# EAGLE board CPU (EAGLE 7.6.0)
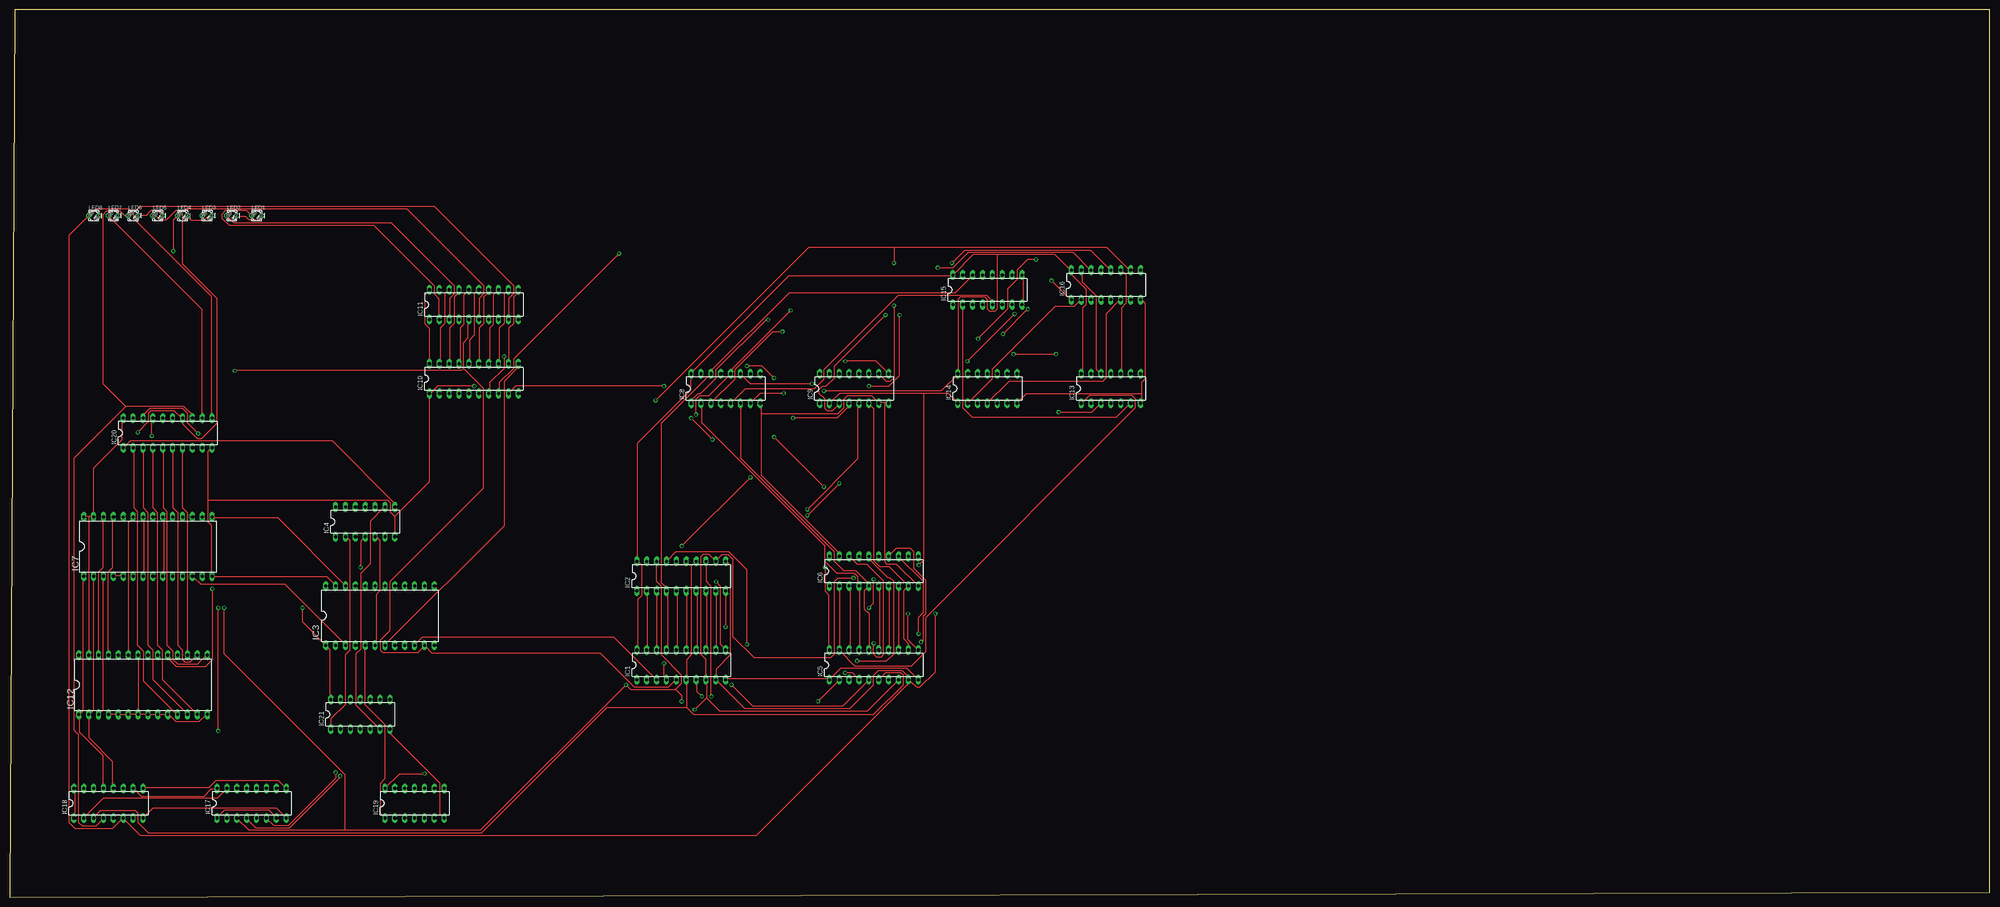
[diagram p0: board, top side]
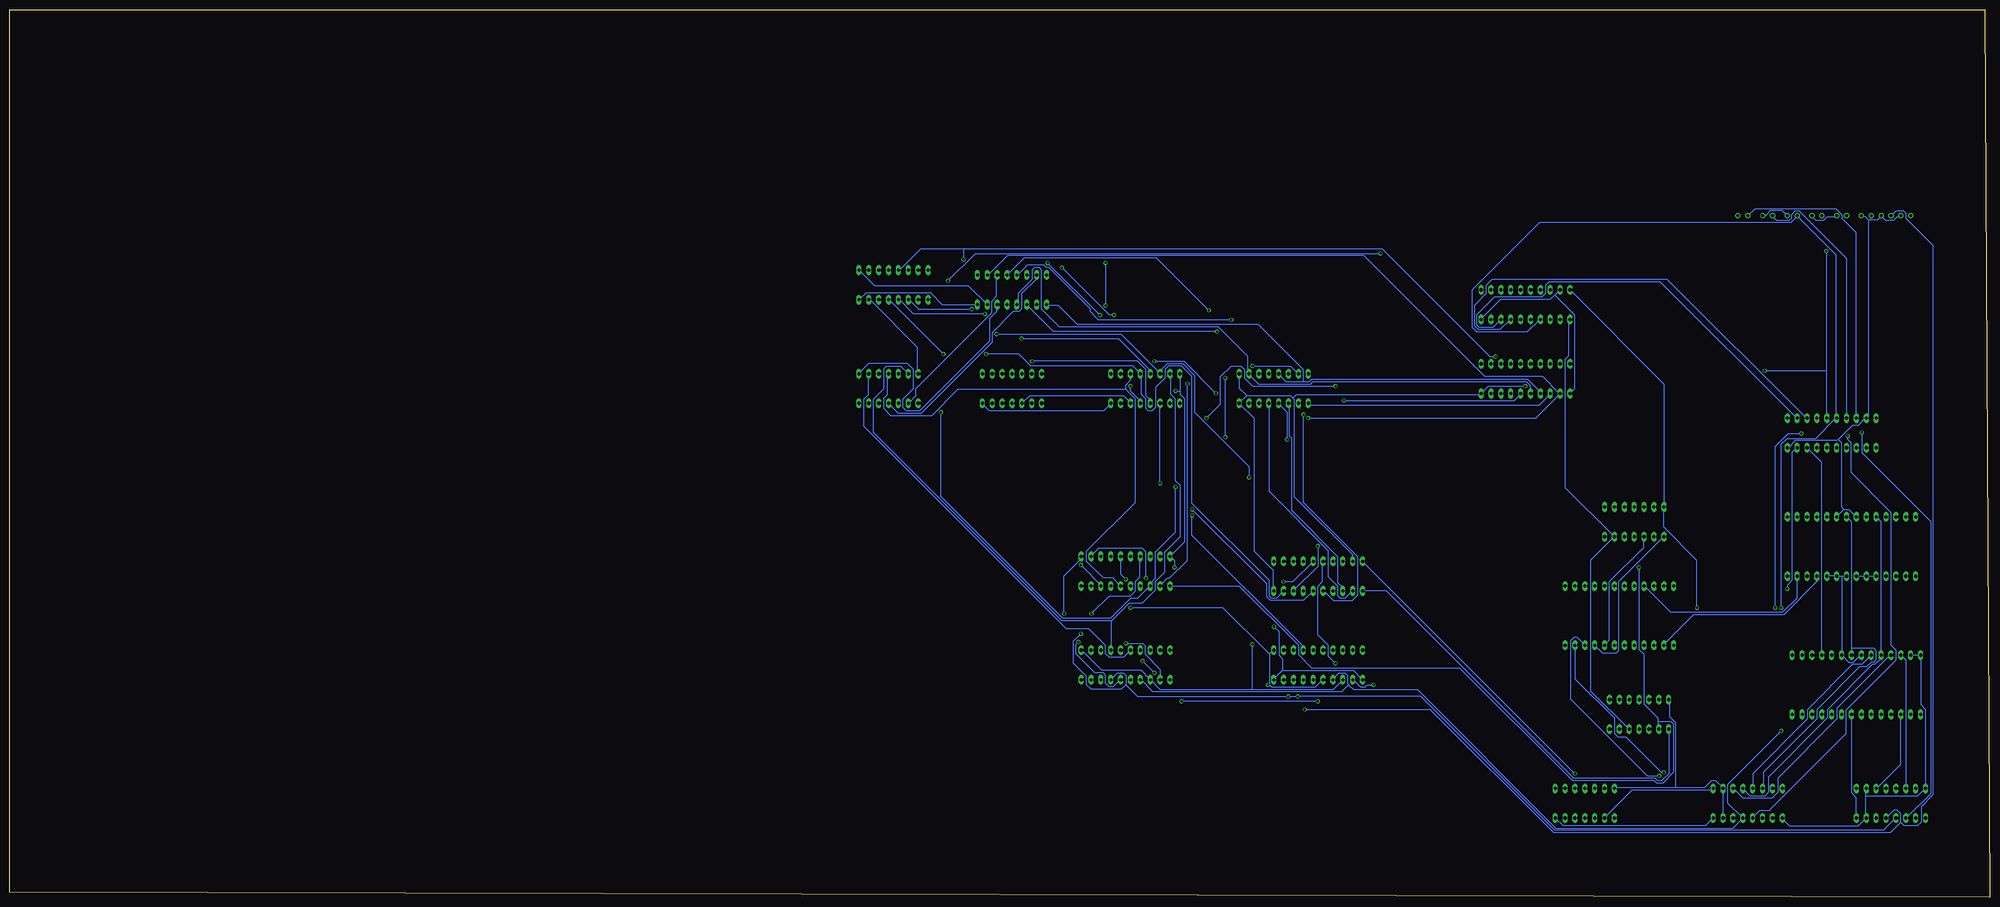
[diagram p1: board, bottom side, seen from below]

Size 509.25 x 228.27 mm. Coordinates in mm from the lower left corner, seen from the top.
Outline: 0,0 509.25,1.27 509.25,228.27 1.27,228.27 0,0
Copper layers (1*16): Top 0.035mm / dielectric 1.5mm / Bottom 0.035mm
Design rules "default": minimum track width 10mil, minimum drill 24mil, track to track 8mil, track to pad 8mil, pad to pad 8mil, via to via 8mil, smd to smd 8mil, copper to edge 40mil, drill to drill 8mil, minimum pad ring 10mil, minimum via ring 8mil, stop-mask expansion 4mil, vias tented up to drill 0mil, thermal gap 10mil
Net classes: 0 default: width 0.305 mm, drill 0.508 mm, clearance 0.305 mm; 1 VCC: width 0.381 mm, drill 0.508 mm, clearance 0.305 mm to class 0; 2 GND: width 0.381 mm, drill 0.508 mm, clearance 0.305 mm to class 0

## Footprints (pad centres in the part's own frame; a part is rotated, then mirrored left to right if it is on the bottom)
DIL20 = drill 0.813 long: 1 -11.43,-3.81; 2 -8.89,-3.81; 3 -6.35,-3.81; 4 -3.81,-3.81; 5 -1.27,-3.81; 6 1.27,-3.81; 7 3.81,-3.81; 8 6.35,-3.81; 9 8.89,-3.81; 10 11.43,-3.81; 11 11.43,3.81; 12 8.89,3.81; 13 6.35,3.81; 14 3.81,3.81; 15 1.27,3.81; 16 -1.27,3.81; 17 -3.81,3.81; 18 -6.35,3.81; 19 -8.89,3.81; 20 -11.43,3.81
DIL24-6 = drill 0.813 long: 1 -13.97,-7.62; 2 -11.43,-7.62; 3 -8.89,-7.62; 4 -6.35,-7.62; 5 -3.81,-7.62; 6 -1.27,-7.62; 7 1.27,-7.62; 8 3.81,-7.62; 9 6.35,-7.62; 10 8.89,-7.62; 11 11.43,-7.62; 12 13.97,-7.62; 13 13.97,7.62; 14 11.43,7.62; 15 8.89,7.62; 16 6.35,7.62; 17 3.81,7.62; 18 1.27,7.62; 19 -1.27,7.62; 20 -3.81,7.62; 21 -6.35,7.62; 22 -8.89,7.62; 23 -11.43,7.62; 24 -13.97,7.62
DIL14 = drill 0.813 long: 1 -7.62,-3.81; 2 -5.08,-3.81; 3 -2.54,-3.81; 4 0,-3.81; 5 2.54,-3.81; 6 5.08,-3.81; 7 7.62,-3.81; 8 7.62,3.81; 9 5.08,3.81; 10 2.54,3.81; 11 0,3.81; 12 -2.54,3.81; 13 -5.08,3.81; 14 -7.62,3.81
DIL28-6 = drill 0.813 long: 1 -16.51,-7.62; 2 -13.97,-7.62; 3 -11.43,-7.62; 4 -8.89,-7.62; 5 -6.35,-7.62; 6 -3.81,-7.62; 7 -1.27,-7.62; 8 1.27,-7.62; 9 3.81,-7.62; 10 6.35,-7.62; 11 8.89,-7.62; 12 11.43,-7.62; 13 13.97,-7.62; 14 16.51,-7.62; 15 16.51,7.62; 16 13.97,7.62; 17 11.43,7.62; 18 8.89,7.62; 19 6.35,7.62; 20 3.81,7.62; 21 1.27,7.62; 22 -1.27,7.62; 23 -3.81,7.62; 24 -6.35,7.62; 25 -8.89,7.62; 26 -11.43,7.62; 27 -13.97,7.62; 28 -16.51,7.62
DIL16 = drill 0.813 long: 1 -8.89,-3.81; 2 -6.35,-3.81; 3 -3.81,-3.81; 4 -1.27,-3.81; 5 1.27,-3.81; 6 3.81,-3.81; 7 6.35,-3.81; 8 8.89,-3.81; 9 8.89,3.81; 10 6.35,3.81; 11 3.81,3.81; 12 1.27,3.81; 13 -1.27,3.81; 14 -3.81,3.81; 15 -6.35,3.81; 16 -8.89,3.81
LED_LD260 = drill 0.813 octagon: A -1.27,0; K 1.27,0

## Placement (x,y rotation side)
IC1  74HC574N  [DIL20]  172.72,59.69 0 top
IC2  74LS541N  [DIL20]  172.72,82.55 0 top
IC3  4514N  [DIL24-6]  95.25,72.39 0 top
IC4  74LS04N  [DIL14]  91.44,96.52 0 top
IC5  74HC574N  [DIL20]  222.25,59.69 0 top
IC6  74LS541N  [DIL20]  222.25,83.82 0 top
IC7  CY62256LL-PC  [DIL28-6]  35.56,90.17 0 top
IC8  74S283N  [DIL16]  184.15,130.81 0 top
IC9  74S283N  [DIL16]  217.17,130.81 0 top
IC10  74HC574N  [DIL20]  119.38,133.35 0 top
IC11  74LS541N  [DIL20]  119.38,152.4 0 top
IC12  CY62256LL-PC  [DIL28-6]  34.29,54.61 0 top
IC13  74AS04N  [DIL14]  283.21,130.81 0 top
IC14  74AS04N  [DIL14]  251.46,130.81 0 top
IC15  74S283N  [DIL16]  251.46,156.21 0 top
IC16  74S283N  [DIL16]  281.94,157.48 0 top
IC17  [DIL16]  62.23,24.13 0 top
IC18  [DIL16]  25.4,24.13 0 top
IC19  74ALS04N  [DIL14]  104.14,24.13 0 top
IC20  74LS541N  [DIL20]  40.64,119.38 0 top
IC21  74LS08N  [DIL14]  90.17,46.99 0 top
LED1  [LED_LD260]  63.5,175.26 0 top
LED2  [LED_LD260]  57.15,175.26 0 top
LED3  [LED_LD260]  50.8,175.26 0 top
LED4  [LED_LD260]  44.45,175.26 0 top
LED5  [LED_LD260]  38.1,175.26 0 top
LED6  [LED_LD260]  31.75,175.26 0 top
LED7  [LED_LD260]  26.67,175.26 0 top
LED8  [LED_LD260]  21.59,175.26 0 top

## Library data of the parts
IC1 IC2 IC4-IC6 IC8-IC11 IC13-IC16 IC19-IC21 = 74xx-us
IC3 = 45xx
IC7 IC12 = memory-sram
IC17 IC18 = ic-package
LED1-LED8 = eagle-ltspice; SPICEMODEL: NONE; SPICEPREFIX: D; SPICETYPE: diode

## Nets
BUS0: IC1.2 IC2.18 IC5.2 IC6.18 IC11.2 IC17.3 IC20.18 LED1.A
BUS1: IC1.3 IC2.17 IC3.10 IC5.3 IC5.11 IC6.17 IC11.3 IC17.4 IC20.17 LED2.A
BUS2: IC1.4 IC2.16 IC5.4 IC6.16 IC11.4 IC17.5 IC20.16 LED3.A
BUS3: IC1.5 IC1.11 IC2.15 IC3.11 IC5.5 IC6.15 IC11.5 IC17.6 IC20.15 LED4.A
BUS4: IC1.6 IC2.14 IC5.6 IC6.14 IC11.6 IC18.3 IC20.14 LED5.A
BUS5: IC1.7 IC2.13 IC5.7 IC6.13 IC11.7 IC18.4 IC20.13 LED6.A
BUS6: IC1.8 IC2.12 IC5.8 IC6.12 IC11.8 IC18.5 IC20.12 LED7.A
BUS7: IC1.9 IC2.11 IC5.9 IC6.11 IC11.9 IC18.6 IC20.11 LED8.A
GND: IC1.1 IC1.10 IC2.10 IC2.19 IC3.23 IC4.7 IC5.1 IC5.10 IC6.10 IC6.19 IC7.4 IC7.5 IC7.6 IC7.7 IC7.8 IC7.9 IC7.10 IC7.14 IC7.20 IC7.22 IC8.8 IC8.9 IC9.7 IC9.8 IC10.1 IC10.10 IC11.10 IC11.19 IC12.4 IC12.5 IC12.6 IC12.7 IC12.8 IC12.9 IC12.10 IC12.14 IC12.20 IC12.22 IC13.7 IC14.7 IC15.8 IC15.9 IC16.8 IC17.8 IC18.8 IC19.7 IC20.10 IC20.19 IC21.7 LED1.K LED2.K LED3.K LED4.K LED5.K LED6.K LED7.K LED8.K
N$1: IC1.19 IC2.2 IC8.5 IC15.5
N$2: IC1.18 IC2.3 IC8.3 IC15.3
N$3: IC1.17 IC2.4 IC8.14 IC15.14
N$4: IC1.14 IC2.7 IC9.3 IC16.14
N$5: IC1.15 IC2.6 IC9.5 IC16.12
N$6: IC4.8 IC20.1
N$7: IC1.13 IC2.8 IC9.14 IC16.3
N$8: IC1.12 IC2.9 IC9.12 IC16.5
N$9: IC3.2 IC7.11
N$10: IC3.3 IC7.12
N$11: IC3.21 IC7.13
N$12: IC3.22 IC7.15
N$13: IC3.9 IC4.1
N$14: IC2.1 IC4.2 IC21.1
N$15: IC13.2 IC15.11
N$16: IC13.4 IC15.15
N$17: IC5.17 IC6.4 IC8.2
N$18: IC5.16 IC6.5 IC8.6 IC13.9
N$19: IC5.15 IC6.6 IC9.11 IC13.11
N$20: IC5.14 IC6.7 IC9.15 IC13.13
N$21: IC5.13 IC6.8 IC9.2 IC14.1
N$22: IC13.5
N$23: IC4.4 IC6.1 IC21.2
N$24: IC3.8 IC4.3
N$25: IC1.16 IC2.5 IC8.12 IC15.12
N$26: IC8.7 IC9.9
N$27: IC8.4 IC10.2 IC15.10
N$28: IC8.1 IC10.3 IC15.13
N$29: IC8.13 IC10.4 IC15.1
N$30: IC8.10 IC10.5 IC15.4
N$31: IC9.10 IC10.6 IC16.10
N$32: IC9.13 IC10.7 IC16.13
N$33: IC10.8 IC16.1
N$34: IC9.4 IC10.9 IC16.4
N$35: IC10.19 IC11.18
N$36: IC10.18 IC11.17
N$37: IC10.17 IC11.16
N$38: IC10.16 IC11.15
N$39: IC10.15 IC11.14
N$40: IC10.14 IC11.13
N$41: IC10.13 IC11.12
N$42: IC10.12 IC11.11
N$43: IC3.7 IC10.11
N$44: IC3.6 IC4.5
N$45: IC4.6 IC11.1 IC21.5
N$46: IC7.21 IC12.21 IC17.14
N$47: IC7.23 IC12.23 IC17.13
N$48: IC7.24 IC12.24 IC17.12
N$49: IC7.25 IC12.25 IC17.11
N$50: IC7.26 IC12.26 IC18.14
N$51: IC7.1 IC12.1 IC18.13
N$52: IC7.2 IC12.2 IC18.12
N$53: IC7.3 IC12.3 IC18.11
N$54: IC12.11 IC20.2
N$55: IC12.12 IC20.3
N$56: IC12.13 IC20.4
N$57: IC12.15 IC20.5
N$58: IC12.16 IC20.6
N$59: IC12.17 IC20.7
N$60: IC12.18 IC20.8
N$61: IC5.18 IC6.3 IC8.15 IC13.3
N$62: IC5.19 IC6.2 IC8.11 IC13.1
N$63: IC13.6 IC15.2
N$64: IC13.8 IC15.6
N$65: IC13.10 IC16.11
N$66: IC13.12 IC16.15
N$67: IC5.12 IC6.9 IC9.6 IC14.3
N$68: IC14.2 IC16.2
N$69: IC14.4 IC16.6
N$70: IC17.2
N$71: IC17.15 IC18.2
N$72: IC3.5 IC19.1
N$73: IC17.9 IC18.9 IC19.2
N$74: IC15.7 IC16.9
N$75: IC4.9 IC21.6
N$76: IC21.4
N$77: IC12.19 IC20.9
VCC: IC1.20 IC2.20 IC3.1 IC4.14 IC5.20 IC6.20 IC7.27 IC7.28 IC8.16 IC9.16 IC10.20 IC11.20 IC12.27 IC12.28 IC13.14 IC14.14 IC15.16 IC16.7 IC16.16 IC17.1 IC17.7 IC17.10 IC17.16 IC18.1 IC18.7 IC18.10 IC18.16 IC19.14 IC20.20 IC21.14
VDD: IC3.24
VSS: IC3.12

## Tracks (layer width: path | path; a pad name or v marks a point on that pad's centre or on a via)
BUS0  (via drill 0.61)
  Top 0.305: LED1.A 60.96,176.53 55.47,176.53 54.56,175.62 54.56,174.7 56.39,172.87 93.57,172.87 109.12,157.33 109.12,155.19 110.34,153.98 110.34,148.79 IC11.2 | v222.2,65.28 222.2,62.54 223.11,61.62 224.03,61.62 224.64,62.23 224.64,81.43 220.37,85.7 217.93,85.7 216.1,87.53 IC6.18 | 86.26,17.12 121.01,17.12 v158.5,54.61 159.72,53.39 171.3,53.39 | 86.26,17.12 61.57,17.12 58.52,20.17 IC17.3 | 171.3,53.39 172.82,54.92 172.82,57.05 167.64,62.23 167.64,79.91 166.42,81.13 166.42,86.31 IC2.18 | v207.87,50.34 213.36,55.83 IC5.2 | v172.82,50.34 172.82,51.87 171.3,53.39 | v48.46,119.23 45.72,121.97 45.72,124.41 44.5,125.63 35.97,125.63 34.44,124.1 34.44,123.19 IC20.18 | v55.17,74.42 55.17,62.54 86.26,31.45 86.26,17.12
  Bottom 0.305: LED1.A 60.35,177.14 39.62,177.14 38.1,175.62 38.1,174.7 34.44,171.04 34.44,123.19 IC20.18 | IC5.2 213.36,58.57 217.32,62.54 217.32,64.67 217.93,65.28 v222.2,65.28 | v158.5,54.61 160.02,54.61 160.63,54 161.85,54 163.68,55.83 IC1.2 | v172.82,50.34 v207.87,50.34 | v48.46,119.23 51.82,119.23 55.17,115.88 v55.17,74.42
BUS1  (via drill 0.61)
  Top 0.305: IC11.3 113.08,148.79 113.08,153.98 114.3,155.19 114.3,157.33 98.15,173.48 57.61,173.48 56.08,175.01 LED2.A | v85.04,31.14 85.04,30.84 71.93,17.73 63.4,17.73 60.96,20.17 IC17.4 | IC2.17 171.3,88.75 185.01,88.75 189.59,84.18 v189.59,64.97 | v231.04,72.9 231.04,66.19 233.48,63.75 IC5.11 | IC1.3 155.45,66.8 106.07,66.8 104.24,64.97 IC3.10 | v36.58,118.62 36.58,123.19 IC20.17
  Bottom 0.305: IC20.17 36.88,123.19 36.88,164.34 49.07,176.53 49.99,176.53 50.9,175.62 50.9,174.7 51.51,174.09 54.86,174.09 55.78,175.01 LED2.A | v85.04,31.14 88.09,31.14 107.9,50.95 107.9,65.89 106.98,66.8 106.07,66.8 104.24,64.97 IC3.10 | IC1.3 168.86,53.39 189.59,53.39 | 189.59,53.39 213.36,53.39 215.8,55.83 IC5.3 216.1,56.13 218.24,58.27 228.29,58.27 233.48,63.45 IC5.11 | 189.59,53.39 v189.59,64.97 | v231.04,72.9 226.47,77.47 220.98,77.47 219.76,78.69 219.76,81.13 218.54,82.35 218.54,87.53 IC6.17 | v36.58,118.62 36.58,117.7 35.66,116.79 35.66,109.17 25.3,98.81 25.3,64.67 24.08,63.45 24.08,61.01 36.88,48.21 36.88,42.11 56.69,22.3 59.13,22.3 60.96,20.47 IC17.4
BUS2  (via drill 0.61)
  Top 0.305: v168.25,60.1 168.25,56.74 168.86,56.13 IC1.4 | IC6.16 220.98,86.92 225.86,82.04 226.47,82.04 227.38,81.13 227.38,62.54 225.55,60.71 v217.93,60.71 | v214.88,57.66 216.71,57.66 218.24,56.13 IC5.4 | v53.65,42.72 v53.65,74.42
  Bottom 0.305: 39.62,123.19 39.62,165.25 49.38,175.01 LED3.A 49.68,175.01 51.21,173.48 115.82,173.48 133.2,156.11 133.2,146.66 131.98,145.44 118.87,145.44 115.82,148.49 IC11.4 | 164.9,54.61 165.2,54.92 165.2,57.05 165.81,57.66 167.34,57.66 168.86,56.13 IC1.4 | 164.9,54.61 163.68,53.39 147.22,53.39 111.56,17.73 66.14,17.73 63.7,20.17 IC17.5 63.7,20.47 67.36,24.13 67.36,29.01 v53.65,42.72 | v168.25,60.1 170.08,61.93 170.08,64.67 172.82,67.41 172.82,79.91 171.6,81.13 171.6,86.31 IC2.16 | 164.9,54.61 166.73,52.78 215.19,52.78 218.24,55.83 IC5.4 | v214.88,57.66 v217.93,60.71 | 39.62,123.19 44.81,118.01 52.12,118.01 53.65,116.48 v53.65,74.42 | 39.62,123.19 IC20.16
BUS3  (via drill 0.61)
  Top 0.305: v181.66,81.13 182.88,79.91 182.88,64.97 184.1,63.75 IC1.11 | v185.62,54.61 191.11,49.12 214.27,49.12 220.98,55.83 IC5.5 | v222.2,81.74 222.2,75.64 v220.98,74.42 | v42.06,166.17 42.06,174.09 42.98,175.01 LED4.A | v83.82,32.05 83.82,30.53 71.63,18.34 67.97,18.34 66.14,20.17 IC17.6 | 116.74,135.99 116.74,142.7 117.96,143.92 117.96,148.49 IC11.5 | 116.74,135.99 121.92,130.81 121.92,105.21 97.84,81.13 97.84,68.63 95.4,66.19 95.4,63.45 96.01,62.84 104.85,62.84 106.68,64.67 | v57.91,135.38 116.13,135.38 116.74,135.99 | 106.68,64.67 108.51,62.84 151.79,62.84 160.63,54 169.47,54 171.3,55.83 IC1.5 | 106.68,64.67 IC3.11
  Bottom 0.305: 185.32,54.61 184.71,54 173.43,54 171.6,55.83 IC1.5 | 185.32,62.54 185.32,54.61 | 185.32,62.54 184.4,63.45 IC1.11 | IC2.15 179.22,81.13 v181.66,81.13 | 185.32,54.61 v185.62,54.61 | v222.2,81.74 223.42,82.96 223.42,87.53 IC6.15 | v220.98,74.42 197.21,74.42 185.32,62.54 | v42.06,166.17 42.06,135.38 | 42.06,135.38 42.06,123.19 IC20.15 | v83.82,32.05 84.43,32.05 93.57,41.2 95.71,41.2 96.62,42.11 96.62,46.08 106.68,56.13 IC3.11 | v57.91,135.38 42.06,135.38
BUS4  (via drill 0.61)
  Top 0.305: IC2.14 175.26,85.09 175.26,62.23 174.04,61.01 174.04,56.13 IC1.6 174.04,55.83 174.04,48.82 | 174.04,48.82 175.87,46.99 222.2,46.99 229.82,54.61 229.82,57.05 229.21,57.66 225.25,57.66 223.72,56.13 IC5.6 | v234.39,65.58 235,66.19 235,72.29 235.61,72.9 235.61,81.43 232.56,84.48 232.56,88.75 231.65,89.66 227.99,89.66 226.16,87.83 IC6.14 | v32.92,119.53 35.66,122.28 35.66,124.41 36.27,125.02 42.37,125.02 44.2,123.19 IC20.14 44.5,123.19 44.5,121.67 48.16,118.01 49.38,118.01 53.34,121.97 53.34,153.98 44.5,162.81 44.5,175.62 44.2,175.92 | 44.2,175.92 43.59,176.53 42.67,176.53 40.23,174.09 38.71,174.09 37.8,175.01 36.88,175.01 LED5.A | 44.2,175.92 45.41,177.14 102.11,177.14 121.92,157.33 121.92,155.19 120.7,153.98 120.7,148.79 IC11.6 | 174.04,48.82 153.62,48.82 121.31,16.51 35.66,16.51 32.92,19.25 32.92,21.69 32.31,22.3 23.47,22.3 21.64,20.47 IC18.3
  Bottom 0.305: v234.39,65.58 235,64.97 235,62.54 230.12,57.66 227.99,57.66 227.38,57.05 227.38,54.92 226.47,54 225.55,54 223.72,55.83 IC5.6 | v32.92,119.53 32.92,114.35 15.24,96.67 15.24,26.57 21.34,20.47 IC18.3
BUS5  (via drill 0.61)
  Top 0.305: v178,51.56 176.78,52.78 176.78,55.83 IC1.7 | v180.44,51.56 180.44,79.91 179.22,81.13 179.22,86.31 IC2.13 | v233.78,67.72 233.78,71.98 235,73.2 235,81.13 228.6,87.53 IC6.13 | 29.87,126.24 16.46,112.83 16.46,43.03 17.68,41.81 17.68,19.25 18.59,18.34 22.25,18.34 24.08,20.17 IC18.4 | 29.87,126.24 44.81,126.24 46.94,124.1 46.94,123.19 IC20.13 | 29.87,126.24 24.08,132.03 24.08,175.62 24.99,176.53 28.35,176.53 29.57,175.31 30.48,175.31 LED6.A
  Bottom 0.305: 222.2,54.61 219.15,51.56 v180.44,51.56 v178,51.56 146.3,51.56 111.86,17.12 27.43,17.12 24.38,20.17 IC18.4 | 222.2,54.61 222.2,57.05 222.81,57.66 224.33,57.66 225.86,56.13 IC5.7 | v233.78,67.72 235.61,65.89 235.61,60.1 232.26,56.74 232.26,54.61 231.04,53.39 223.42,53.39 222.2,54.61 | IC11.7 123.44,148.49 125.88,146.05 131.67,146.05 132.59,146.96 132.59,152.15 129.54,155.19 129.54,157.33 128.02,158.85 82.91,158.85 47.24,123.19 IC20.13
BUS6  (via drill 0.61)
  Top 0.305: 179.22,51.26 182.57,47.9 220.68,47.9 228.6,55.83 IC5.8 | 179.22,51.26 179.22,55.83 IC1.8 178.92,56.13 178.92,61.32 177.7,62.54 177.7,87.53 178.31,88.14 179.83,88.14 IC2.12 181.66,86.61 183.19,88.14 184.71,88.14 185.93,86.92 185.93,67.11 191.41,61.62 211.23,61.62 212.14,62.54 212.14,81.13 213.06,82.04 v217.02,82.04 | IC20.12 49.38,123.19 49.38,151.23 25.6,175.01 LED7.A | v176.17,48.21 179.22,51.26
  Bottom 0.305: v217.02,82.04 217.02,88.75 217.93,89.66 229.21,89.66 231.04,87.83 IC6.12 | IC18.5 24.69,22.3 23.77,22.3 22.86,21.39 22.86,19.25 | 22.86,19.25 21.95,18.34 18.59,18.34 17.68,19.25 17.68,23.22 14.63,26.26 14.63,167.69 21.64,174.7 21.64,175.92 22.25,176.53 24.08,176.53 25.3,175.31 LED7.A | IC11.8 125.88,148.49 127.71,146.66 131.37,146.66 131.98,147.27 131.98,149.71 127.41,154.28 115.21,154.28 114.3,155.19 114.3,157.33 113.39,158.24 84.73,158.24 49.68,123.19 IC20.12 | v176.17,48.21 143.87,48.21 112.17,16.51 25.6,16.51 22.86,19.25
BUS7  (via drill 0.61)
  Top 0.305: IC2.11 184.4,86.31 185.32,85.39 185.32,62.23 181.66,58.57 181.66,56.13 IC1.9 188.98,48.51 216.1,48.51 222.2,54.61 222.2,57.05 223.42,58.27 229.51,58.27 231.04,56.74 231.04,56.13 IC5.9 | v238.05,72.9 238.05,57.96 234.09,54 233.17,54 231.65,55.52 | 231.65,55.52 231.34,55.83 IC5.9 | 31.7,175.92 31.7,174.7 51.82,154.58 51.82,123.19 IC20.11 | 31.7,175.92 30.48,177.14 22.25,177.14 20.42,175.31 LED8.A 20.12,175.01 15.24,170.13 15.24,19.25 16.76,17.73 26.52,17.73 28.96,20.17 IC18.6 29.26,20.17 33.53,15.9 192.02,15.9 231.65,55.52 | 31.7,175.92 33.53,177.75 109.12,177.75 129.54,157.33 129.54,155.19 128.32,153.98 128.32,148.79 IC11.9 | 231.65,55.52 IC5.9
  Bottom 0.305: v238.05,72.9 238.05,82.65 233.78,86.92 233.78,87.53 IC6.11
GND  (via drill 0.61)
  Top 0.305: IC21.7 97.84,43.03 97.84,42.11 110.64,29.31 110.64,21.39 111.56,20.47 IC19.7 | IC12.4 IC12.5 IC12.6 IC12.7 33.22,46.99 | 33.22,46.99 IC12.8 IC12.9 IC12.10 40.84,46.99 42.67,45.16 48.77,45.16 50.6,46.99 IC12.14 | IC18.8 36.88,22.91 68.58,22.91 71.02,20.47 IC17.8 | 33.22,46.99 33.22,62.23 IC12.22 | 99.06,97.89 IC4.7 | 99.06,97.89 107.9,106.73 107.9,129.29 IC10.1 108.2,129.59 110.03,131.42 v119.48,131.42 | LED2.K 58.52,175.01 60.66,175.01 61.57,174.09 63.7,174.09 64.62,175.01 LED1.K | LED3.K 51.82,175.01 50.9,175.01 49.99,174.09 46.63,174.09 45.72,175.01 LED4.K | LED5.K 38.1,176.53 36.27,176.53 35.05,175.31 33.22,175.31 LED6.K | IC3.23 83.82,80.21 81.69,82.35 52.12,82.35 IC7.14 51.82,82.65 51.82,95.76 50.9,96.67 50.9,102.16 | IC7.4 26.82,82.65 28.96,82.65 IC7.5 | IC7.9 39.62,82.65 39.62,97.59 IC7.20 | IC7.7 34.44,82.65 34.44,97.59 IC7.22 | 50.9,102.16 50.9,114.66 51.82,115.57 IC20.10 | 99.06,97.89 97.84,99.11 97.84,101.55 97.23,102.16 50.9,102.16 | IC15.8 260.6,152.45 260.6,159.77 IC15.9 | 291.08,129.59 291.08,132.33 292,133.25 292,152.76 291.08,153.67 IC16.8 | 291.08,129.59 291.08,127.15 IC13.7 | 224.94,127.15 225.86,127.15 IC9.8 | 224.94,127.15 223.72,127.15 IC9.7 223.42,127.15 221.59,128.98 215.49,128.98 214.58,128.07 214.58,125.93 213.06,124.41 193.24,124.41 | IC6.10 227.99,85.7 225.55,85.7 224.94,86.31 224.94,127.15 | 291.08,129.59 261.52,129.59 259.08,127.15 IC14.7 | IC5.10 233.48,56.13 230.73,58.88 213.66,58.88 210.92,56.13 IC5.1 210.62,56.13 184.4,56.13 IC1.10 | IC6.19 213.36,88.44 193.24,108.56 193.24,124.41 | 193.24,124.41 193.24,126.85 IC8.8 | v184.1,69.55 184.1,78.69 IC2.10
  Bottom 0.305: IC12.22 33.22,62.23 35.05,60.4 36.27,60.4 IC12.20 38.1,82.65 | IC18.8 34.44,20.47 34.44,25.65 35.66,26.87 35.66,46.99 IC12.8 | IC19.7 111.56,20.17 109.73,18.34 73.15,18.34 71.32,20.17 IC17.8 | 111.86,154.89 110.64,156.11 IC11.19 | 111.86,154.89 113.08,153.67 125.88,153.67 130.76,148.79 IC11.10 | 111.86,154.89 106.68,149.71 106.68,130.81 IC10.1 | LED8.K 22.86,175.01 23.77,175.01 24.69,174.09 26.82,174.09 27.74,175.01 LED7.K 28.04,175.01 28.96,174.09 31.09,174.09 | 31.09,174.09 32,175.01 32.92,175.01 LED6.K | LED5.K 39.62,175.01 41.76,175.01 42.67,174.09 44.81,174.09 45.72,175.01 LED4.K | LED3.K 53.34,176.53 56.39,176.53 57.61,175.31 58.22,175.31 LED2.K | 39.01,117.7 35.36,121.36 33.83,121.36 32,123.19 IC20.19 31.7,123.19 31.09,123.8 31.09,174.09 | 39.01,117.7 39.32,117.4 49.99,117.4 51.82,115.57 IC20.10 | IC7.7 34.14,82.65 32,82.65 IC7.6 31.7,82.65 29.26,82.65 IC7.5 | 38.1,82.65 39.32,82.65 IC7.9 39.62,82.65 41.76,82.65 IC7.10 | 38.1,82.65 36.88,82.65 IC7.8 | 37.49,99.72 36.27,99.72 34.44,97.89 IC7.22 | 37.49,99.72 39.32,97.89 IC7.20 | 39.01,117.7 38.1,116.79 38.1,100.33 37.49,99.72 | IC15.8 260.6,152.45 269.44,152.45 272.49,155.5 288.95,155.5 290.78,153.67 IC16.8 | IC14.7 259.08,126.85 257.25,125.02 227.99,125.02 226.16,126.85 IC9.8 | IC1.1 163.68,58.27 181.97,58.27 | 181.97,58.27 184.1,56.13 IC1.10 | IC2.10 184.4,78.99 184.4,84.18 189.28,89.05 189.28,123.19 192.94,126.85 IC8.8 192.94,127.15 191.11,128.98 | 179.22,128.37 179.83,128.98 191.11,128.98 | 179.22,128.37 178.92,128.07 178.92,103.07 163.98,88.14 163.98,86.61 IC2.19 | 179.22,128.37 178.31,129.29 131.06,129.29 IC10.10 128.93,131.42 v119.48,131.42
  Bottom 0.305: 191.11,128.98 192.94,130.81 192.94,134.47 IC8.9 | 181.97,58.27 181.97,61.32 182.88,62.23 182.88,68.33 v184.1,69.55
N$1
  Top 0.305: IC1.19 163.98,63.75 163.98,78.69 IC2.2 | IC15.5 252.68,152.45 252.68,153.37 251.16,154.89 228.6,154.89 209.4,135.69 209.4,133.25 206.96,130.81 189.28,130.81 185.62,127.15 IC8.5
  Bottom 0.305: IC8.5 185.32,126.85 185.32,104.29 170.08,89.05 170.08,82.35 167.64,79.91 167.64,77.47 167.03,76.86 165.81,76.86 163.98,78.69 IC2.2
N$2  (via drill 0.61)
  Top 0.305: IC1.18 166.42,63.75 166.42,78.69 IC2.3 | v198.73,145.44 196.29,145.44 186.54,135.69 186.54,133.25 180.44,127.15 IC8.3
  Bottom 0.305: IC8.3 180.14,126.85 180.14,118.62 179.53,118.01 179.53,99.42 167.64,87.53 167.64,80.82 166.42,79.6 166.42,78.99 IC2.3 | v198.73,145.44 240.79,145.44 247.5,152.15 IC15.3
N$3
  Top 0.305: IC1.17 169.16,63.75 169.16,78.69 IC2.4 168.86,78.99 168.86,79.6 167.64,80.82 167.64,121.97 180.14,134.47 IC8.14 180.44,134.77 180.44,135.38 200.56,155.5 243.23,155.5 247.5,159.77 IC15.14
N$4  (via drill 0.61)
  Top 0.305: IC1.14 176.78,63.75 176.78,78.69 IC2.7 | v205.13,98.2 v213.36,106.43 | v238.66,161.9 242.62,161.9 246.58,165.86 273.41,165.86 277.98,161.29 IC16.14 | v225.25,149.71 212.14,136.6 212.14,133.55 210.01,131.42 209.09,131.42 208.18,130.51 208.18,129.59 209.7,128.07 209.7,125.63 210.31,125.02 211.53,125.02 213.36,126.85 IC9.3
  Bottom 0.305: v213.36,106.43 IC9.3 | v205.13,98.2 205.13,93.02 176.78,64.67 176.78,63.75 IC1.14 | v238.66,161.9 226.47,149.71 v225.25,149.71
N$5  (via drill 0.61)
  Top 0.305: IC1.15 174.04,63.75 174.04,78.69 IC2.6 | v205.13,99.72 218.24,112.83 218.24,126.85 IC9.5 | v242.32,163.12 245.67,166.47 277.98,166.47 283.16,161.29 IC16.12 | v228.91,149.71 228.91,134.16 226.16,131.42 v220.98,131.42
  Bottom 0.305: v205.13,99.72 185.93,80.52 185.93,77.16 185.01,76.25 176.48,76.25 IC2.6 | v228.91,149.71 v242.32,163.12 | v220.98,131.42 220.98,130.2 218.54,127.76 218.54,127.15 IC9.5
N$6
  Top 0.305: IC4.8 99.06,101.24 82.91,117.4 31.09,117.4 29.26,115.57 IC20.1
N$7  (via drill 0.61)
  Top 0.305: IC1.13 179.22,63.75 179.22,78.69 IC2.8 | v261.82,151.23 v255.42,144.83 | v190.5,107.95 v172.82,90.27
  Bottom 0.305: 213.66,135.08 223.42,144.83 v255.42,144.83 | 213.66,135.08 213.36,134.77 IC9.14 213.66,135.08 | v261.82,151.23 275.54,151.23 277.98,153.67 IC16.3 | v172.82,90.27 172.82,85.09 178.92,78.99 IC2.8 | v190.5,107.95 190.5,110.69 204.52,124.71 204.52,134.16 207.57,137.21 211.53,137.21 213.66,135.08
N$8  (via drill 0.61)
  Top 0.305: IC1.12 181.66,63.75 181.66,78.69 IC2.9 | v258.17,139.65 v269.14,139.65
  Bottom 0.305: IC2.9 183.49,76.86 184.71,76.86 185.32,77.47 185.32,81.43 205.13,101.24 205.13,133.86 207.87,136.6 211.23,136.6 212.14,135.69 212.14,133.55 214.58,131.12 214.58,125.93 215.49,125.02 216.41,125.02 217.02,125.63 217.02,128.07 218.24,129.29 218.24,134.47 IC9.12 218.54,134.77 220.37,136.6 246.58,136.6 249.63,139.65 v258.17,139.65 | v269.14,139.65 283.16,153.67 IC16.5
N$9
  Bottom 0.305: IC3.2 83.82,64.97 76.2,72.59 53.03,72.59 44.5,81.13 44.5,82.35 IC7.11
N$10
  Top 0.305: IC3.3 86.26,64.97 70.71,80.52 49.07,80.52 47.24,82.35 IC7.12
N$11
  Bottom 0.305: IC3.21 88.7,79.91 81.99,73.2 53.34,73.2 49.68,76.86 49.68,82.35 IC7.13
N$12
  Top 0.305: IC3.22 86.26,80.21 68.89,97.59 52.12,97.59 IC7.15
N$13
  Bottom 0.305: IC4.1 95.4,81.13 95.4,63.45 96.01,62.84 99.67,62.84 IC3.9
N$14
  Top 0.305: IC21.1 82.6,43.33 82.6,45.77 86.26,49.43 86.26,62.23 87.48,63.45 87.48,91.8 86.56,92.71 IC4.2
  Bottom 0.305: IC2.1 161.24,78.69 155.14,78.69 106.98,30.53 85.95,30.53 85.34,29.92 84.43,29.92 82.6,31.75 82.6,43.03 IC21.1
N$15
  Bottom 0.305: IC13.2 276.15,128.98 276.15,130.81 256.64,150.32 256.64,153.37 255.42,154.58 255.42,159.77 IC15.11
N$16
  Bottom 0.305: IC13.4 283.16,126.85 280.72,124.41 274.93,124.41 256.64,142.7 256.64,145.14 251.16,150.62 249.63,150.62 249.02,151.23 249.02,155.19 245.36,158.85 245.36,159.77 IC15.15
N$17
  Top 0.305: IC5.17 218.54,63.75 218.54,79.91 IC6.4 218.24,80.21 218.24,82.35 217.32,83.26 212.75,83.26 209.7,86.31 209.7,90.27 178,121.97 178,126.85 IC8.2
N$18
  Top 0.305: IC5.16 220.98,72.9 219.76,74.12 219.76,78.69 220.98,79.91 IC6.5 220.98,80.52 217.63,83.87 214.58,83.87 212.14,86.31 212.14,88.75 188.06,112.83 188.06,126.85 IC8.6
  Bottom 0.305: IC13.9 288.34,134.47 288.34,129.29 289.56,128.07 289.56,121.06 237.44,68.94 231.65,68.94 227.38,64.67 227.38,62.54 226.47,61.62 222.81,61.62 220.98,63.45 IC5.16
N$19
  Top 0.305: IC5.15 223.72,63.75 223.72,79.91 IC6.6
  Bottom 0.305: IC9.11 220.98,132.94 222.2,131.72 222.2,130.51 | 222.2,130.51 219.76,128.07 219.76,101.55 232.26,89.05 232.26,86.31 227.99,82.04 225.55,82.04 IC6.6 | 222.2,130.51 265.48,130.51 272.19,123.8 282.55,123.8 284.38,125.63 284.38,128.37 283.46,129.29 283.46,134.47 IC13.11
N$20
  Top 0.305: IC5.14 226.16,63.75 226.16,79.91 IC6.7
  Bottom 0.305: 225.86,71.07 221.28,75.64 217.93,75.64 214.58,78.99 214.58,81.13 212.14,83.57 212.14,88.75 208.18,92.71 208.18,105.82 209.4,107.04 209.4,128.07 210.62,129.29 210.62,134.47 IC9.15 | 225.86,71.07 225.86,63.75 IC5.14 | IC13.13 280.11,136.6 283.77,136.6 284.38,135.99 284.38,130.81 287.12,128.07 287.12,119.53 238.66,71.07 225.86,71.07
N$21  (via drill 0.61)
  Top 0.305: IC6.8 IC5.13 | 235,129.59 241.4,129.59 243.84,127.15 IC14.1 | 235,129.59 213.36,129.59 210.92,127.15 IC9.2 | v233.78,85.39 235,86.61 235,129.59
  Bottom 0.305: v233.78,85.39 228.6,80.21 IC6.8
N$23  (via drill 0.61)
  Top 0.305: v90.22,84.78 90.22,91.49 IC4.4
  Bottom 0.305: 85.34,45.16 85.34,46.08 89,49.73 89,62.54 90.22,63.75 v90.22,84.78 | 85.34,45.16 85.34,43.33 IC21.2 | 85.34,45.16 81.99,45.16 81.38,44.55 81.38,32.05 84.12,29.31 85.65,29.31 86.26,29.92 107.29,29.92 136.25,58.88 174.35,58.88 177.7,62.23 177.7,64.67 192.94,79.91 210.62,79.91 IC6.1
N$24
  Bottom 0.305: IC4.3 89,92.71 89,89.97 97.84,81.13 97.84,66.19 99.06,64.97 IC3.8
N$25  (via drill 0.61)
  Top 0.305: IC1.16 171.6,63.75 171.6,78.69 IC2.5 | v176.48,124.1 176.48,128.07 177.39,128.98 179.83,128.98 185.32,134.47 IC8.12 185.62,134.77 185.62,135.69 v200.86,150.93
  Bottom 0.305: v176.48,124.1 176.48,101.55 162.46,87.53 162.46,77.77 163.98,76.25 168.86,76.25 171.3,78.69 IC2.5 | IC15.12 248.41,164.34 214.27,164.34 v200.86,150.93
N$26  (via drill 0.61)
  Top 0.305: v199.03,129.59 192.94,129.59 190.5,127.15 IC8.7 | v214.88,137.82 222.81,137.82 225.86,134.77 IC9.9
  Bottom 0.305: v199.03,129.59 207.26,137.82 v214.88,137.82
N$27  (via drill 0.61)
  Top 0.305: v180.75,117.7 v175.26,123.19
  Bottom 0.305: v175.26,123.19 116.74,123.19 110.64,129.29 IC10.2 110.64,129.59 114.91,133.86 129.84,133.86 160.93,164.95 252.68,164.95 257.56,160.07 IC15.10 | v180.75,117.7 180.75,124.71 182.88,126.85 IC8.4
N$28  (via drill 0.61)
  Top 0.305: v195.07,148.49 194.46,148.49 181.66,135.69 181.66,133.55 177.7,129.59 177.09,129.59 175.26,127.76 IC8.1
  Bottom 0.305: IC10.3 113.08,129.29 115.82,126.54 174.96,126.54 175.26,126.85 IC8.1 | v195.07,148.49 229.21,148.49 231.34,150.62 231.34,151.23 242.01,161.9 242.62,161.9 243.23,162.51 247.5,162.51 249.94,160.07 IC15.13
N$29
  Bottom 0.305: 176.48,132.64 181.05,132.64 182.88,134.47 IC8.13 | 176.48,132.64 174.96,132.64 174.35,133.25 118.87,133.25 115.82,130.2 115.82,129.59 IC10.4 | 176.48,132.64 176.48,135.69 188.06,147.27 234.7,147.27 239.57,152.15 242.32,152.15 IC15.1
N$30
  Bottom 0.305: IC10.5 118.26,129.59 118.26,131.72 119.18,132.64 174.04,132.64 174.65,132.03 188.06,132.03 190.5,134.47 IC8.10 190.5,134.77 190.81,135.08 190.81,139.04 198.43,146.66 239.27,146.66 243.84,151.23 243.84,161.29 244.45,161.9 245.67,161.9 246.28,161.29 246.28,158.85 249.94,155.19 249.94,152.45 IC15.4
N$31  (via drill 0.61)
  Top 0.305: v166.12,127.76 205.44,167.08 227.38,167.08 | 227.38,167.08 282.25,167.08 288.04,161.29 IC16.10 | v227.38,152.15 227.38,133.55 226.47,132.64 225.55,132.64 223.72,134.47 IC9.10 | 227.38,167.08 v227.38,163.12
  Bottom 0.305: v166.12,127.76 122.22,127.76 120.7,129.29 IC10.6 | v227.38,163.12 v227.38,152.15
N$32  (via drill 0.61)
  Top 0.305: v127.1,139.04 127.1,135.99 123.44,132.33 123.44,129.59 IC10.7 | v249.02,143.61 256.64,151.23 256.64,156.41 259.08,158.85 259.08,161.29 261.82,164.03 v263.96,164.03
  Bottom 0.305: v127.1,139.04 128.63,139.04 156.36,166.78 263.96,166.78 | 263.96,166.78 274.93,166.78 280.42,161.29 IC16.13 | v249.02,143.61 224.03,143.61 216.1,135.69 216.1,134.77 IC9.13 | 263.96,166.78 v263.96,164.03
N$33  (via drill 0.61)
  Top 0.305: v156.67,165.56 129.54,138.43 129.54,135.99 125.88,132.33 125.88,129.59 IC10.8 | v267.92,158.55 272.8,153.67 IC16.1
  Bottom 0.305: v156.67,165.56 260.91,165.56 v267.92,158.55
N$34  (via drill 0.61)
  Top 0.305: IC10.9 130.15,131.42 v168.25,131.42 | v201.47,123.19 212.75,123.19 215.8,126.24 215.8,126.85 IC9.4 | v246.28,137.82 v258.47,150.01
  Bottom 0.305: v168.25,131.42 189.59,131.42 191.72,133.55 191.72,135.69 192.63,136.6 195.07,136.6 197.81,133.86 197.81,126.85 v201.47,123.19 | v258.47,150.01 276.76,150.01 280.42,153.67 IC16.4 | v246.28,137.82 219.15,137.82 217.02,135.69 217.02,128.98 216.1,128.07 216.1,127.15 IC9.4
N$35
  Top 0.305: IC10.19 110.64,137.21 110.64,146.36 111.86,147.57 111.86,155.19 112.78,156.11 IC11.18
N$36
  Top 0.305: IC10.18 113.08,137.21 113.08,146.36 114.3,147.57 114.3,154.28 115.52,155.5 115.52,156.11 IC11.17
N$37
  Top 0.305: IC10.17 115.82,137.21 115.82,146.36 116.74,147.27 116.74,154.89 117.96,156.11 IC11.16
N$38
  Top 0.305: IC10.16 118.26,137.21 118.26,143.31 119.48,144.53 119.48,155.19 120.4,156.11 IC11.15
N$39
  Top 0.305: IC10.15 120.7,137.21 120.7,146.36 121.92,147.57 121.92,154.28 123.14,155.5 123.14,156.11 IC11.14
N$40
  Top 0.305: IC10.14 123.44,137.21 123.44,146.36 124.36,147.27 124.36,154.89 125.58,156.11 IC11.13
N$41
  Top 0.305: IC10.13 125.88,137.21 125.88,146.36 127.1,147.57 127.1,155.19 128.02,156.11 IC11.12
N$42
  Top 0.305: IC10.12 128.32,137.21 128.32,146.36 129.54,147.57 129.54,154.28 130.76,155.5 130.76,156.11 IC11.11
N$43
  Top 0.305: IC3.7 96.62,64.97 127.1,95.45 127.1,132.64 130.76,136.3 130.76,136.91 IC10.11
N$44
  Top 0.305: IC3.6 94.18,64.97 94.18,77.77 95.1,78.69 95.1,91.8 94.18,92.71 IC4.5
N$45
  Bottom 0.305: 96.62,92.71 102.72,86.61 102.72,53.09 92.96,43.33 IC21.5 | 96.62,92.71 109.12,105.21 109.12,138.43 108.2,139.34 108.2,148.49 IC11.1 | 96.62,92.71 IC4.6
N$46
  Bottom 0.305: 35.66,64.06 35.66,96.67 36.58,97.59 IC7.21 | 35.66,64.06 35.66,62.23 IC12.21 | 35.66,64.06 29.87,64.06 29.26,63.45 29.26,61.01 29.87,60.4 30.48,60.4 31.7,59.18 33.53,59.18 44.5,48.21 44.5,45.77 58.22,32.05 58.22,28.09 IC17.14
N$47
  Top 0.305: IC12.23 30.48,96.37 31.7,97.59 IC7.23
  Bottom 0.305: IC17.13 60.96,31.75 46.94,45.77 46.94,48.21 35.36,59.79 32.92,59.79 IC12.23
N$48
  Bottom 0.305: 28.04,62.23 28.04,96.67 28.96,97.59 IC7.24 | 28.04,62.23 28.04,61.32 29.57,59.79 30.18,59.79 41.76,48.21 41.76,46.08 57,30.84 57,26.87 57.91,25.96 61.57,25.96 63.4,27.79 IC17.12 | 28.04,62.23 IC12.24
N$49
  Top 0.305: IC7.25 26.52,97.59 26.52,84.78 25.3,83.57 25.3,62.23 IC12.25
  Bottom 0.305: IC17.11 65.84,27.79 63.4,25.35 56.08,25.35 54.56,26.87 54.56,30.53 39.32,45.77 39.32,48.51 25.6,62.23 IC12.25
N$50
  Top 0.305: IC12.26 22.86,83.57 24.08,84.78 24.08,97.59 IC7.26
  Bottom 0.305: IC12.26 21.64,61.01 21.64,28.09 IC18.14
N$51
  Top 0.305: 17.98,46.99 17.98,42.42 24.08,36.32 24.08,28.09 IC18.13 | 17.98,46.99 18.9,47.9 18.9,82.35 IC7.1 | 17.98,46.99 IC12.1
N$52
  Top 0.305: 20.42,46.99 20.42,40.89 26.52,34.8 26.52,28.09 IC18.12 | 20.42,46.99 21.64,48.21 21.64,82.35 IC7.2 | 20.42,46.99 IC12.2
N$53
  Top 0.305: IC12.3 24.08,48.21 24.08,82.35 IC7.3
  Bottom 0.305: IC12.3 22.86,34.19 28.96,28.09 IC18.11
N$54
  Top 0.305: IC20.2 32,115.57 32,100.02 32.92,99.11 32.92,64.67 34.44,63.14 34.44,55.52 42.98,46.99 IC12.11
N$55
  Top 0.305: IC12.12 36.88,55.83 36.88,63.45 35.66,64.67 35.66,98.81 34.44,100.02 34.44,115.57 IC20.3
N$56
  Top 0.305: IC20.4 36.88,115.57 36.88,100.02 38.1,98.81 38.1,64.67 39.32,63.45 39.32,55.83 48.16,46.99 IC12.13
N$57
  Top 0.305: IC20.5 39.62,115.57 39.62,100.02 40.54,99.11 40.54,64.67 42.06,63.14 42.06,61.01 43.28,59.79 48.16,59.79 50.6,62.23 IC12.15
N$58
  Top 0.305: IC20.6 42.06,115.57 42.06,100.02 43.28,98.81 43.28,64.67 44.5,63.45 44.5,61.01 45.11,60.4 46.33,60.4 48.16,62.23 IC12.16
N$59
  Top 0.305: IC12.17 45.72,98.81 44.5,100.02 44.5,115.57 IC20.7
N$60
  Bottom 0.305: IC12.18 43.28,62.23 43.28,111.91 46.94,115.57 IC20.8
N$61  (via drill 0.61)
  Top 0.305: v189.59,136.6 193.55,136.6 v196.6,133.55 | v209.4,105.51 v196.6,118.31 | IC5.18 216.1,63.75 216.1,79.91 IC6.3 | v269.75,124.71 278.28,124.71 280.42,126.85 IC13.3
  Bottom 0.305: v189.59,136.6 179.83,136.6 178,134.77 IC8.15 | v196.6,118.31 v196.6,133.55 | v209.4,105.51 209.4,93.93 214.58,88.75 214.58,82.04 215.8,80.82 215.8,80.21 IC6.3 216.1,79.91 219.15,76.86 220.98,76.86 226.16,71.68 238.35,71.68 269.75,103.07 v269.75,124.71
N$62  (via drill 0.61)
  Top 0.305: IC6.2 IC5.19 213.36,63.45 217.32,59.49 231.95,59.49 235.61,63.14 235.61,71.98 289.56,125.93 289.56,128.07 288.65,128.98 277.67,128.98 275.84,127.15 IC13.1 | v206.35,132.03 190.5,132.03 188.06,134.47 IC8.11
  Bottom 0.305: v206.35,132.03 206.35,86.61 210.92,82.04 211.53,82.04 213.36,80.21 IC6.2
N$63
  Top 0.305: IC13.6 288.04,126.85 284.68,123.49 247.5,123.49 245.06,125.93 245.06,152.15 IC15.2
N$64
  Bottom 0.305: IC13.8 290.78,134.77 288.34,137.21 278.28,137.21 276.76,135.69 276.76,130.81 279.5,128.07 279.5,125.93 278.59,125.02 275.23,125.02 257.25,143 257.25,148.79 255.42,150.62 255.42,152.15 IC15.6
N$65
  Top 0.305: IC13.10 285.9,134.77 285.9,151.54 287.12,152.76 287.12,160.07 285.9,161.29 IC16.11
N$66
  Top 0.305: IC16.15 275.84,161.29 275.84,158.24 279.5,154.58 279.5,135.69 280.42,134.77 IC13.12
N$67
  Top 0.305: IC5.12 231.04,63.75 231.04,65.28 229.82,66.5 229.82,78.69 IC6.9 231.04,80.21 226.16,85.09 223.72,85.09 222.2,86.61 222.2,125.63 220.98,126.85 IC9.6
  Bottom 0.305: IC9.6 220.98,127.15 222.81,128.98 246.89,128.98 248.72,127.15 IC14.3
N$68
  Top 0.305: IC14.2 246.58,127.15 252.68,133.25 252.68,135.69 268.83,151.84 273.71,151.84 275.54,153.67 IC16.2
N$69
  Top 0.305: IC14.4 251.46,127.15 256.95,132.64 281.03,132.64 281.94,133.55 281.94,150.01 285.6,153.67 IC16.6
N$71
  Top 0.305: IC18.2 24.08,25.35 53.34,25.35 55.78,27.79 IC17.15
N$72
  Top 0.305: IC3.5 91.44,49.43 96.62,44.25 96.62,30.53 95.4,29.31 95.4,21.39 96.32,20.47 IC19.1
N$73
  Top 0.305: IC18.9 34.44,28.09 51.21,28.09 53.03,29.92 69.19,29.92 71.02,28.09 IC17.9
  Bottom 0.305: IC19.2 99.06,20.47 92.05,27.48 71.63,27.48 71.32,27.79 IC17.9
N$74
  Bottom 0.305: IC15.7 262.74,157.33 286.82,157.33 290.78,161.29 IC16.9
N$75
  Top 0.305: IC21.6 89,49.43 89,62.54 90.22,63.75 90.22,83.26 92.66,85.7 92.66,96.67 96.32,100.33 IC4.9
N$77  (via drill 0.61)
  Top 0.305: v52.12,79.3 52.12,61.01 50.29,59.18 42.98,59.18 40.84,61.32 40.84,62.23 IC12.19
  Bottom 0.305: v52.12,79.3 52.12,80.21 50.9,81.43 50.9,114.35 49.68,115.57 IC20.9
VCC  (via drill 0.61)
  Top 0.305: IC1.20 161.54,63.75 161.54,76.56 162.46,77.47 162.46,85.39 161.54,86.31 IC2.20 161.54,86.61 161.54,116.79 175.26,130.51 IC8.16 175.26,134.77 200.25,159.77 242.32,159.77 IC15.16 247.8,165.25 253.9,165.25 | v209.7,84.78 209.7,78.69 210.62,77.77 210.62,63.75 IC5.20 | 253.9,165.25 268.83,165.25 272.8,161.29 IC16.16 273.1,161.29 273.1,160.07 276.76,156.41 276.76,152.45 275.84,151.54 275.84,134.77 IC13.14 | 253.9,165.25 253.9,151.23 253.29,150.62 252.07,150.62 251.46,151.23 251.46,153.67 250.85,154.28 244.45,154.28 243.84,153.67 IC14.14 243.84,134.47 239.57,130.2 v209.4,130.2 | 20.42,97.89 21.34,97.89 IC7.27 21.64,97.89 21.64,110.39 28.96,117.7 28.96,123.19 IC20.20 | 20.42,97.89 19.2,97.89 IC7.28 | IC17.16 53.34,27.79 51.82,27.79 49.99,25.96 33.83,25.96 32,27.79 IC18.10 | IC18.1 16.76,20.47 16.76,27.79 IC18.16 | 20.42,97.89 20.42,62.23 IC12.27 | IC10.20 107.9,137.21 107.9,146.36 106.68,147.57 106.68,154.89 107.9,156.11 IC11.20 | IC21.14 82.3,50.95 82.3,63.75 IC3.1 75.29,70.76 v75.29,74.42 | IC17.1 53.34,20.47 55.17,22.3 66.75,22.3 68.58,20.47 IC17.7 | v106.68,31.75 100.28,31.75 96.62,28.09 IC19.14
  Bottom 0.305: v209.7,84.78 209.7,86.61 210.62,87.53 IC6.20 206.96,91.49 206.96,128.07 208.18,129.29 208.18,130.2 | 208.18,130.2 208.18,134.47 IC9.16 | IC13.14 275.84,134.77 275.84,141.48 288.04,153.67 IC16.7 | v209.4,130.2 208.18,130.2 | 32,25.96 32,27.79 IC18.10 | 32,25.96 32,20.47 IC18.7 32,20.17 33.83,18.34 51.51,18.34 53.34,20.17 IC17.1 | IC12.27 IC12.28 17.68,62.23 17.68,49.43 16.46,48.21 16.46,28.09 IC18.16 16.76,27.79 18.59,25.96 32,25.96 | IC11.20 107.9,156.11 83.82,132.03 IC4.14 83.82,95.15 75.29,86.61 v75.29,74.42 | IC17.7 IC17.10 68.58,28.09 70.41,29.92 71.63,29.92 73.46,28.09 80.77,28.09 | 80.77,28.09 96.32,28.09 IC19.14 | 80.77,28.09 80.77,44.86 82.3,46.38 82.3,50.65 IC21.14 | v106.68,31.75 IC2.20